# Altium PCB PCB.PcbDoc
Units mil, origin at the board's own origin, x right, y up, seen from the top; angles counter-clockwise.
Board outline 6000 x 4000 mil, 2 copper layers (Top Layer, Bottom Layer); 103 components, 49 nets, 312 pads, 12 vias.
Unrouted connection lines stored in the file: 214.
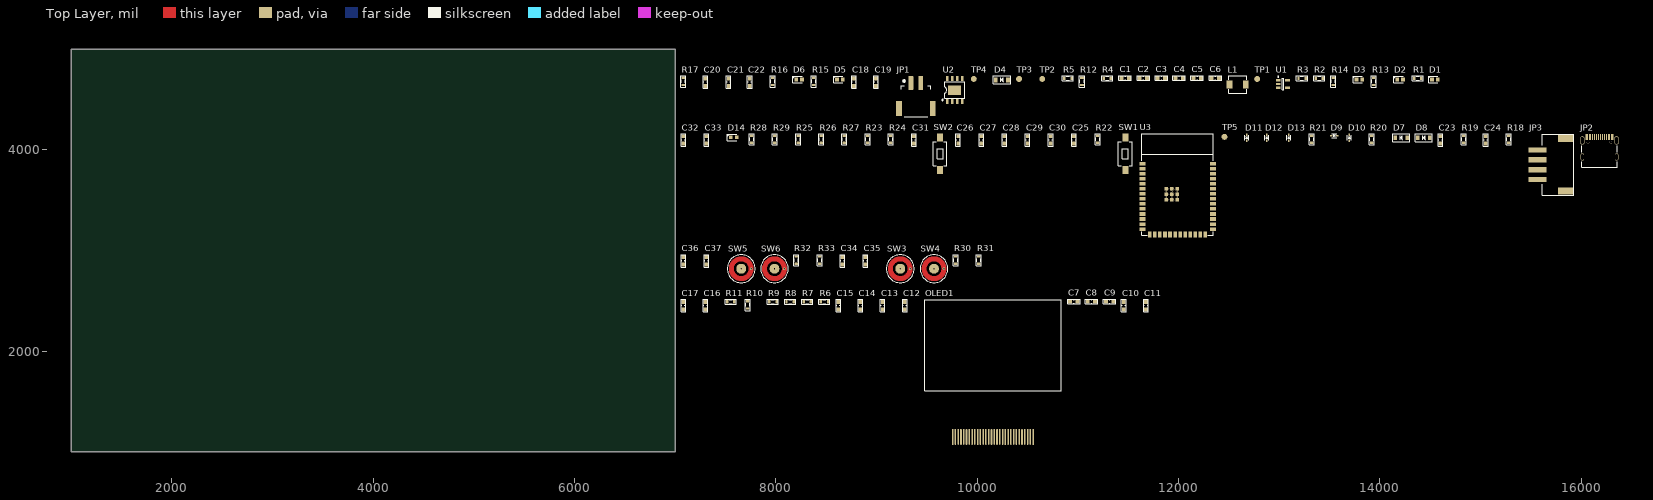
[diagram p0: Top Layer view]
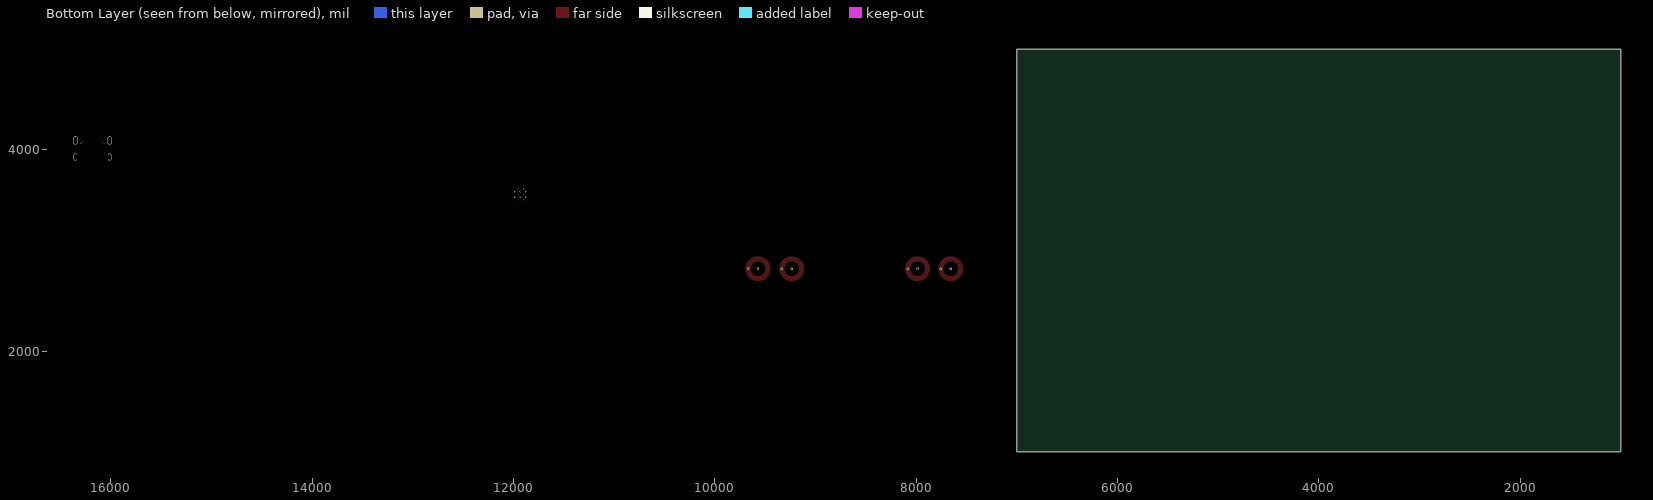
[diagram p1: Bottom Layer view, seen from below]

## Layer stack, top to bottom
Top Solder: solder mask 0.4, Solder Resist, Dk 3.5
Top Layer: signal copper 1.4
Dielectric 1: dielectric 12.6, FR-4, Dk 4.8
Bottom Layer: signal copper 1.4
Bottom Solder: solder mask 0.4, Solder Resist, Dk 3.5

## Board outline
1000,1000 7000,1000 7000,5000 1000,5000

## Design rules (kind name [scope] priority, off if disabled: settings)
Clearance [All] p1: gap=10 ignorepadtopadclearanceinfootprint=FALSE
PolygonConnect [All] p1: connectstyle=Relief reliefconductorwidth=10 reliefentries=4 polygonreliefangle="90 Angle" airgapwidth=10
RoutingVias [All] p1: holewidth=28 width=50 viastyle="Through Hole" minholewidth=28 minwidth=50 maxholewidth=28 maxwidth=50
SolderMaskExpansion [All] p1: expansion=4 istentingtop=FALSE
Width [All] p1: maxlimit=10 minlimit=10 preferedwidth=10
30 further rules are at their usual default settings.

## Classes and differential pairs
component class VOLTAGE_SOURCE: C1 C2 C3 C4 C5 C6 C18 C19 C20 C21 C22 D1 D2 D3 D4 D5 D6 JP1 L1 R1 R2 R3 R4 R5 R12 R13 R14 R15 R16 R17 TP1 TP2 TP3 TP4 U1 U2
component class MCU: C23 C24 C25 C26 C27 C28 C29 C30 C31 C32 C33 D7 D8 D9 D10 D11 D12 D13 D14 JP2 JP3 R18 R19 R20 R21 R22 R23 R24 R25 R26 R27 R28 R29 SW1 SW2 TP5 U3
component class FUNCTION_BUTTONS: C34 C35 C36 C37 R30 R31 R32 R33 SW3 SW4 SW5 SW6
component class DISPLAY: C7 C8 C9 C10 C11 C12 C13 C14 C15 C16 C17 OLED1 R6 R7 R8 R9 R10 R11

## Components (designator, comment, footprint, x,y, rotation, side; value= is the part's Value field where it differs from the comment)
C1 "10uF 16V" CAP_SMD_0603 11470,4715 r0 top
C2 "1uF 50V" CAP_SMD_0603 11650,4715 r0 top
C3 "100nF 50V" CAP_SMD_0603 11830,4715 r0 top
C4 "100nF 50V" CAP_SMD_0603 12005,4715 r0 top
C5 "1uF 50V" CAP_SMD_0603 12185,4715 r0 top
C6 "10uF 16V" CAP_SMD_0603 12365,4715 r0 top
C7 "10uF 16V" CAP_SMD_0603 10960,2495 r0 top
C8 "1uF 50V" CAP_SMD_0603 11135,2495 r0 top
C9 "100nF 50V" CAP_SMD_0603 11315,2495 r0 top
C10 "100nF 50V" CAP_SMD_0603 11455,2455 r90 top
C11 "100nF 50V" CAP_SMD_0603 11675,2455 r90 top
C12 "2.2uF 16V" CAP_SMD_0603 9280,2455 r90 top
C13 "2.2uF 16V" CAP_SMD_0603 9060,2455 r90 top
C14 "2.2uF 16V" CAP_SMD_0603 8840,2455 r90 top
C15 "2.2uF 16V" CAP_SMD_0603 8620,2455 r90 top
C16 "2.2uF 16V" CAP_SMD_0603 7300,2455 r90 top
C17 "10uF 16V" CAP_SMD_0603 7080,2455 r90 top
C18 "10uF 16V" CAP_SMD_0603 8775,4675 r90 top
C19 "1uF 50V" CAP_SMD_0603 8995,4675 r90 top
C20 "10uF 16V" CAP_SMD_0603 7300,4675 r90 top
C21 "1uF 50V" CAP_SMD_0603 7530,4675 r90 top
C22 "100nF 50V" CAP_SMD_0603 7740,4675 r90 top
C23 "10uF 16V" CAP_SMD_0603 14600,4100 r90 top
C24 "10uF 16V" CAP_SMD_0603 15050,4100 r90 top
C25 "100nF 50V" CAP_SMD_0603 10960,4100 r90 top
C26 "10uF 16V" CAP_SMD_0603 9810,4100 r90 top
C27 "100nF 50V" CAP_SMD_0603 10040,4100 r90 top
C28 "100nF 50V" CAP_SMD_0603 10270,4100 r90 top
C29 "100nF 50V" CAP_SMD_0603 10500,4100 r90 top
C30 "100nF 50V" CAP_SMD_0603 10730,4100 r90 top
C31 "100nF 50V" CAP_SMD_0603 9370,4100 r90 top
C32 "1uF 50V" CAP_SMD_0603 7080,4100 r90 top
C33 "1uF 50V" CAP_SMD_0603 7310,4100 r90 top
C34 "100nF 50V" CAP_SMD_0603 8660,2900 r90 top
C35 "100nF 50V" CAP_SMD_0603 8890,2900 r90 top
C36 "100nF 50V" CAP_SMD_0603 7080,2900 r90 top
C37 "100nF 50V" CAP_SMD_0603 7310,2900 r90 top
D1 "0603 RED" LED-0603 14545,4700 r0 top
D2 "0603 RED" LED-0603 14200,4700 r0 top
D3 "0603 RED" LED-0603 13795,4700 r0 top
D4 "1N5819" DIO-SMD-123 10245,4695 r0 top
D5 "0603 RED" LED-0603 8635,4700 r0 top
D6 "0603 GREEN" LED-0603 8230,4700 r0 top
D7 "1N5819" DIO-SMD-123 14210,4120 r0 top
D8 "1N5819" DIO-SMD-123 14435,4120 r0 top
D9 "TVS_5.6V" SOD_523 13515,4140 r0 top
D10 "TVS_5.6V" SOD_523 13695,4090 r90 top
D11 "TVS_5.6V" SOD_523 12675,4090 r90 top
D12 "TVS_5.6V" SOD_523 12875,4090 r90 top
D13 "TVS_5.6V" SOD_523 13095,4090 r90 top
D14 "0603 RED" LED-0603 7580,4125 r0 top
JP1 "X8821WRS-02L" CONN_X8821WRS-02L-LPSN 9390,4665 r0 top
JP2 "TYPE C 16P" "TYPE C 16P" 16180,3930 r0 top
JP3 "X8821WRS-04L" CONN_X8821WRS-04L-LPSN 15565,3705 r90 top
L1 "2.2uH 4.5A 20%" L0420 12665,4650 r0 top
OLED1 "OLED SSD1306 1.3\"" "OLED 1.3" 9755,1150 r0 top
R1 "330R 1%" RES_SMD_0603 14375,4710 r0 top
R2 "100K 1%" RES_SMD_0603 13395,4710 r0 top
R3 "0R" RES_SMD_0603 13225,4710 r0 top
R4 "680K 1%" RES_SMD_0603 11290,4710 r0 top
R5 "150K 1%" RES_SMD_0603 10900,4710 r0 top
R6 "0R" RES_SMD_0603 8480,2490 r0 top
R7 "10K 1%" RES_SMD_0603 8310,2490 r0 top
R8 "0R" RES_SMD_0603 8140,2490 r0 top
R9 "10K 1%" RES_SMD_0603 7970,2490 r0 top
R10 "0R" RES_SMD_0603 7720,2460 r90 top
R11 "390K 1%" RES_SMD_0603 7550,2490 r0 top
R12 "0R" RES_SMD_0603 11040,4680 r90 top
R13 "330R 1%" RES_SMD_0603 13940,4680 r90 top
R14 "330R 1%" RES_SMD_0603 13535,4680 r90 top
R15 "1K 1%" RES_SMD_0603 8375,4680 r90 top
R16 "1K 1%" RES_SMD_0603 7970,4680 r90 top
R17 "1.2K 1%" RES_SMD_0603 7080,4680 r90 top
R18 "0R" RES_SMD_0603 15280,4105 r90 top
R19 "0R" RES_SMD_0603 14830,4105 r90 top
R20 "0R" RES_SMD_0603 13920,4105 r90 top
R21 "0R" RES_SMD_0603 13320,4105 r90 top
R22 "0R" RES_SMD_0603 11195,4105 r90 top
R23 "4.7K 1%" RES_SMD_0603 8910,4105 r90 top
R24 "4.7K 1%" RES_SMD_0603 9140,4105 r90 top
R25 "330R 1%" RES_SMD_0603 8220,4105 r90 top
R26 "10K 1%" RES_SMD_0603 8450,4105 r90 top
R27 "10K 1%" RES_SMD_0603 8680,4105 r90 top
R28 "0R" RES_SMD_0603 7760,4105 r90 top
R29 "0R" RES_SMD_0603 7990,4105 r90 top
R30 "4.7K 1%" RES_SMD_0603 9785,2905 r90 top
R31 "4.7K 1%" RES_SMD_0603 10015,2905 r90 top
R32 "4.7K 1%" RES_SMD_0603 8200,2905 r90 top
R33 "4.7K 1%" RES_SMD_0603 8435,2905 r90 top
SW1 "TACTILE_2P" "C&K SW 2P" 11470,3800 r90 top
SW2 "TACTILE_2P" "C&K SW 2P" 9630,3800 r90 top
SW3 "TOUCH_BUTTON" TOUCH_BUTTON 9235,2820 r0 top
SW4 "TOUCH_BUTTON" TOUCH_BUTTON 9570,2820 r0 top
SW5 "TOUCH_BUTTON" TOUCH_BUTTON 7655,2820 r0 top
SW6 "TOUCH_BUTTON" TOUCH_BUTTON 7985,2820 r0 top
TP1 "Test Point" TEST_POINT 12780,4705 r0 top
TP2 "Test Point" TEST_POINT 10645,4705 r90 top
TP3 "Test Point" TEST_POINT 10415,4705 r90 top
TP4 "Test Point" TEST_POINT 9965,4705 r90 top
TP5 "Test Point" TEST_POINT 12455,4130 r90 top
U1 "SY8088AAC" SOT23_5 13035,4655 r0 top
U2 "TP4056" ESOP-8 9775,4595 r0 top
U3 "ESP32-S3-WROOM-1-N4" ESP32-S3-WROOM-1 11875,3615 r0 top

## Footprints (in the part's own frame and the unit in brackets; to place one, negate y for a bottom-side part, rotate by r counter-clockwise, add the part's x,y. Pads: shape width x height; smd on the part's side, far side on the other; paste and mask are expansions set on the pad)
"C&K SW 2P" [mm]
  rect 2x1.5 smd paste+0 mask+0.051: 1(0,0) 2(8.2,0)
  silkscreen extent 1.1,-1.75 7.1,1.75, body extent 0.06,-1.8 8.06,1.8, height 2.5
CAP_SMD_0603 [mm]
  rect 1x0.95 smd mask+0.076: 1(-0.965,0) 2(0.914,0)
  silkscreen extent -1.6,-0.58 1.55,0.58, body extent -0.8,-0.39 0.8,0.41, height 0.9
CONN_X8821WRS-02L-LPSN [mm]
  rrect20% 1.2x3.5 smd: 1(-1.25,0) 2(1.25,0)
  rrect20% 1.5x3.8 smd: 6(-4.25,-6.45) 7(4.25,-6.45)
  silkscreen extent -3.75,-8.5 3.75,0.6, body extent -4.97,-8.5 4.98,1.5, height 6.1
CONN_X8821WRS-04L-LPSN [mm]
  rect 1.3x4.5 smd paste+0 mask+0.051: 1(0,0) 2(2.5,0) 3(5,0) 4(7.5,0)
  rect 1.8x3.9 smd paste+0 mask+0.051: 5(10.34,-7.12) 6(-2.84,-7.12)
  silkscreen extent -3.95,-9.19 11.45,-1.19, body extent -3.82,-8.51 11.18,1.69, height 6.1
DIO-SMD-123 [mm]
  rect 0.9x1.2 smd: A(1.524,0) C(-1.524,0)
  silkscreen extent -2.16,-1.02 2.16,1.02, body extent -1.76,-0.8 1.94,0.8, height 1.25
ESOP-8 [mm]
  rect 0.6x1.2 smd paste+0 mask+0.051: 1(-1.905,-2.908) 2(-0.635,-2.908) 3(0.635,-2.908) 4(1.905,-2.908) 5(1.905,2.908) 6(0.635,2.908) 7(-0.635,2.908) 8(-1.905,2.908)
  rect 3.3x2.4 smd paste+0 mask+0.051: 9(0,0)
  silkscreen extent -3.2,-2.67 2.55,2.05, body extent -2.45,-3 2.45,3, height 1.75
ESP32-S3-WROOM-1 [mm]
  rect 1.5x0.9 smd paste+0 mask+0.05: 1(-6,6.319) 2(-6,5.049) 3(-6,3.779) 4(-6,2.509) 5(-6,1.239) 6(-6,-0.031) 7(-6,-1.301) 8(-6,-2.571) 9(-6,-3.841) 10(-6,-5.111) 11(-6,-6.381) 12(-6,-7.651) 13(-6,-8.921) 14(-6,-10.191) 27(11.8,-10.191) 28(11.8,-8.921) 29(11.8,-7.651) 30(11.8,-6.381) 31(11.8,-5.111) 32(11.8,-3.841) 33(11.8,-2.571) 34(11.8,-1.301) 35(11.8,-0.031) 36(11.8,1.239) 37(11.8,2.509) 38(11.8,3.779) 39(11.8,5.049) 40(11.8,6.319)
  rect 0.9x1.5 smd paste+0 mask+0.05: 15(-4.085,-11.59) 16(-2.815,-11.59) 17(-1.545,-11.59) 18(-0.275,-11.59) 19(0.995,-11.59) 20(2.265,-11.59) 21(3.535,-11.59) 22(4.805,-11.59) 23(6.075,-11.59) 24(7.345,-11.59) 25(8.615,-11.59) 26(9.885,-11.59)
  rect 0.9x0.9 smd paste+0 mask+0.051: 41(0,-2.8) 41(0,-1.4) 41(0,0) 41(1.4,-2.8) 41(1.4,-1.4) 41(1.4,0) 41(2.8,-2.8) 41(2.8,-1.4) 41(2.8,0)
  silkscreen extent -6.1,-11.69 11.9,13.81, body extent -6.1,-11.74 11.94,13.78, height 3.1
L0420 [mm]
  rect 1.4x2.12 smd paste+0 mask+0.051: 1(0,0) 2(-4.056,0)
  silkscreen extent -4.3,-2.18 0.25,2.18, body extent -4.18,-2 0.12,2, height 2.2
LED-0603 [mm]
  rect 0.95x0.95 smd: 1(-0.75,0) 2(0.75,0)
  silkscreen extent -1.58,-0.82 0.75,0.82, body extent -0.8,-0.4 0.8,0.4, height 0.8
"OLED 1.3" [mm]
  rect 0.4x4 smd: A1(0,0) A10(6.3,0) A20(13.3,0) A30(20.3,0)
  oval 0.4x4 smd: A2(0.7,0) A3(1.4,0) A4(2.1,0) A5(2.8,0) A6(3.5,0) A7(4.2,0) A8(4.9,0) A9(5.6,0) A11(7,0) A12(7.7,0) A13(8.4,0) A14(9.1,0) A15(9.8,0) A16(10.5,0) A17(11.2,0) A18(11.9,0) A19(12.6,0) A21(14,0) A22(14.7,0) A23(15.4,0) A24(16.1,0) A25(16.8,0) A26(17.5,0) A27(18.2,0) A28(18.9,0) A29(19.6,0)
  silkscreen extent -7.04,11.61 27.46,34.65, body extent -7.09,-0.41 27.41,34.59, height 1.45
RES_SMD_0603 [mm]
  rect 0.6x0.9 smd: 1(-0.889,0) 2(0.927,0)
  silkscreen extent -1.4,-0.64 1.4,0.64, body extent -0.8,-0.4 0.8,0.4, height 0.43
SOD_523 [mm]
  rect 0.6x0.4 smd paste+0 mask+0.051: 1(0,0) 2(1.5,0)
  silkscreen extent 0.1,-0.5 1.4,0.5, body extent -0.04,-0.4 1.56,0.4, height 0.7
SOT23_5 [mm]
  rect 1.15x0.6 smd: 1(-1.175,0.95) 2(-1.175,0) 3(-1.175,-0.95) 4(1.175,-0.95) 5(1.175,0.95)
  silkscreen extent -1.3,-1.5 0.2,1.92, body extent -1.4,-1.45 1.4,1.45, height 1.45
TEST_POINT [mm]
  round 1.5 smd: 1(0,0)
TOUCH_BUTTON [mm]
  round 2.5 smd: 1(0,0)
  round 0.61 hole 0.31: 1(0,0) 2(2.5,0)
  Top Layer circle w1.25: c0,0 r2.5
  silkscreen extent -3.5,-3.5 3.5,3.5
"TYPE C 16P" [mm]
  rect 0.6x1.5 smd: A1_B12(-3.2,5.004) A4_B9(-2.4,5.004) B1_A12(3.2,5.004) B4_A9(2.4,5.004)
  rect 0.3x1.5 smd: A5(-1.25,5.004) A6(-0.25,5.004) A7(0.25,5.004) A8(1.25,5.004) B5(1.75,5.004) B6(0.75,5.004) B7(-0.75,5.004) B8(-1.75,5.004)
  oval 1.05x2.1 hole 0.6 slot 1.7 at 90 deg: SH1(-4.32,4.18) SH2(4.32,4.18)
  oval 0.9x1.8 hole 0.6 slot 1.4 at 90 deg: SH3(-4.32,0) SH4(4.32,0)
  round 0.65 hole 0.65 unplated: ""(-2.89,3.68) ""(2.89,3.68)
  silkscreen extent -4.47,-2.6 4.47,2.81, body extent -4.5,-2.55 4.44,5.35, height 3.16

## Part data
C1 C6 C7 C17 C18 C20 C23 C24 C26: library part C0603_MLCC_10uF_16V, "10 µF ±20% 16V Ceramic Capacitor X6S 0603 (1608 Metric)", Manufacture Part Number=GRM188C81C106MA73D, Manufacturer="Murata Electronics", Link=https://www.digikey.cn/en/products/detail/murata-electronics/GRM188C81C106MA73D/3900463, Packaging="Cut Tape (CT)", Price=$0.25, Size=0603
C2 C5 C8 C19 C21 C32 C33: library part C0603_MLCC_1uF_50V, "1 µF ±10% 50V Ceramic Capacitor X5R 0603 (1608 Metric)", Manufacture Part Number=CL10A105KB8NNNC, Manufacturer="Samsung Electro-Mechanics", Link=https://www.digikey.cn/en/products/detail/samsung-electro-mechanics/CL10A105KB8NNNC/3887518, Packaging="Cut Tape (CT)", Price=$0.14, Size=0603
C3 C4 C9 C10 C11 C22 C25 C27 C28 C29 C30 C31 C34 C35 C36 C37: library part C0603_MLCC_100nF_50V, "0.1 µF ±10% 50V Ceramic Capacitor X7R 0603 (1608 Metric)", Manufacture Part Number=CL10B104KB8NNNC, Manufacturer="Samsung Electro-Mechanics", Link=https://www.digikey.cn/en/products/detail/samsung-electro-mechanics/CL10B104KB8NNNC/3886658, Packaging="Cut Tape (CT)", Price=$0.10, Size=0603
C12 C13 C14 C15 C16: library part C0603_MLCC_2.2uF_16V, "2.2 µF ±10% 16V Ceramic Capacitor X5R 0603 (1608 Metric)", Manufacture Part Number=CL10A225KO8NNNC, Manufacturer="Samsung Electro-Mechanics", Link=https://www.digikey.cn/en/products/detail/samsung-electro-mechanics/CL10A225KO8NNNC/3886698, Packaging="Cut Tape (CT)", Price=$0.10, Size=0603
D1 D2 D3 D5 D14: library part LED_0603_RED, "Red 625nm LED Indication - Discrete 2V 0603 (1608 Metric)", Manufacture Part Number=150060RS75000, Manufacturer="Würth Elektronik", Link=https://www.digikey.cn/en/products/detail/w%C3%BCrth-elektronik/150060RS75000/4489901, Packaging="Cut Tape (CT)", Price=$0.15
D4 D7 D8: "Diode 40 V 1A Surface Mount SOD-123", Capacitance @ Vr, F="60pF @ 4V, 1MHz", Current - Average Rectified (Io)=1A, Manufacture Part Number=1N5819HW-7-F, Manufacturer="Diodes Incorporated", Operating Temperature - Junction="-65°C ~ 125°C", Voltage - DC Reverse (Vr) (Max)="40 V", Voltage - Forward (Vf) (Max) @ If="450 mV @ 1 A", Link=https://www.digikey.cn/en/products/detail/diodes-incorporated/1N5819HW-7-F/814970, Packaging="Cut Tape (CT)", Price=$0.43
D6: library part LED_0603_GREEN, "Green 520nm LED Indication - Discrete 3.2V 0603 (1608 Metric)", Manufacture Part Number=150060GS75000, Manufacturer="Würth Elektronik", Link=https://www.digikey.cn/en/products/detail/w%C3%BCrth-elektronik/150060GS75000/4489898, Packaging="Cut Tape (CT)", Price=$0.15
D9 D10 D11 D12 D13: "9.4A 18.6V 5.6V Bi-Directional 5V SOD-523 Electrostatic and Surge Protection (TVS/ESD) ROHS", Manufacture Part Number=LESD5D5.0CT1G, Manufacturer=LRC, Voltage - Breakdown (Min)=6V, Voltage - Clamping (Max) @ Ipp=8V, Voltage - Reverse Standoff (Typ)=4V, Link=https://www.lcsc.com/product-detail/New-Arrivals_Leshan-Radio-LESD5D5-0CT1G_C383211.html, Packaging="Cut Tape (CT)", Price="$ 0.0149"
JP1: "1x2P 2P 1 Tin 2.5mm 2 Brass 2A Surface Mount，Right Angle SMD,P=2.5mm,Surface Mount，Right Angle Wire To Board Connector ROHS", Manufacture Part Number=X8821WRS-02L-LPSN, Manufacturer="XKB Connection", Link=https://www.lcsc.com/product-detail/Wire-To-Board-Connector_XKB-Connection-X8821WRS-02L-LPSN_C519150.html, Price="$ 0.0852"
JP2: library part TYPE_C_16P, "USB-C (USB TYPE-C) USB 2.0 Receptacle Connector 24 (16+8 Dummy) Position Surface Mount, Right Angle; Through Hole", Manufacture Part Number=12402012E212A, Manufacturer="Amphenol ICC (Commercial Products)", Link=https://www.digikey.cn/en/products/detail/amphenol-cs-commercial-products/12402012E212A/13683192, Packaging="Cut Tape", Price=$0.79
JP3: "1x4P 4P XH 1 Tin 2.5mm 4 3A Brass Surface Mount，Right Angle SMD,P=2.5mm,Surface Mount，Right Angle Wire To Board Connector ROHS", Manufacture Part Number=X8821WRS-04-9TSN, Manufacturer="XKB Connection", Link=https://www.lcsc.com/product-detail/Wire-To-Board-Connector_XKB-Connection-X8821WRS-04-9TSN_C397434.html, Price="$ 0.1564"
L1: library part L_0420_2.2uH_4.5A, "4.5A 2.2uH Molding Choke ±20% 5A SMD,0420 Power Inductors ROHS", Current=4.5A, Inductor=2.2uH, Manufacture Part Number=XR0420-2R2M, Manufacturer=XR, Tolerance=20%, Link=https://www.lcsc.com/product-detail/Power-Inductors_XR-XR0420-2R2M_C5307589.html, Price="$ 0.0661"
OLED1: library part "1.3\"_SSD1306_OLED", "SSD1306 1.3 - Organic Light Emitting Diode Display Screen ROHS", Manufacture Part Number=UG-2864KSWLG01, Manufacturer="UG(Univision Semicon)", ComponentLink1Description="New link", Link=https://www.lcsc.com/product-detail/Organic-Light-Emitting-Diode-Display-Screen_UG-Univision-Semicon-UG-2864KSWLG01_C113322.html, Link 2=https://shopee.vn/M%C3%A0n-h%C3%ACnh-LCD-SUBEI-ssd1306-12864-B%E1%BA%A3ng-m%C3%A0n-h%C3%ACnh-LCD-LCD-m%C3%B4-%C4%91un-m%C3%A0n-h%C3%ACnh-LCD-OLED-1-3-inch-12864-OLED-30PIN-c%C3%B3-th%E1%BB%83-s%E1%BB%AD-d%E1%BB%A5ng-i.293689495.25025709755?sp_atk=b5fb3fe1-8310-4ca9-bbd1-9b1802fa8d8a&xptdk=b5fb3fe1-8310-4ca9-bbd1-9b1802fa8d8a, Price=$1.96
R1 R13 R14 R25: library part R0603_330R, "330 Ohms ±1% 0.1W, 1/10W Chip Resistor 0603 (1608 Metric) Thick Film", Manufacture Part Number=CRG0603F330R, Manufacturer="TE Connectivity Passive Product", Link=https://www.digikey.cn/en/products/detail/te-connectivity-passive-product/CRG0603F330R/2380765, Packaging="Cut Tape (CT)", Price=$0.10, Size=0603
R2: library part R0603_100K, "100 kOhms ±1% 0.1W, 1/10W Chip Resistor 0603 (1608 Metric) Moisture Resistant Thick Film", Manufacture Part Number=RC0603FR-07100KL, Manufacturer=YAGEO, Link=https://www.digikey.cn/en/products/detail/yageo/RC0603FR-07100KL/726889, Packaging="Cut Tape (CT)", Price=$0.10, Size=0603
R3 R6 R8 R10 R12 R18 R19 R20 R21 R22 R28 R29: library part R0603_0R, "0 Ohms Jumper Chip Resistor 0603 (1608 Metric) Automotive AEC-Q200 Thick Film", Manufacture Part Number=RMCF0603ZT0R00, Manufacturer="Stackpole Electronics Inc", Link=https://www.digikey.cn/en/products/detail/stackpole-electronics-inc/RMCF0603ZT0R00/1756908, Packaging="Cut Tape (CT)", Price=$0.10, Size=0603
R4: library part R0603_680K, "680 kOhms ±1% 0.1W, 1/10W Chip Resistor 0603 (1608 Metric) Moisture Resistant Thick Film", Manufacture Part Number=RC0603FR-07680KL, Manufacturer=YAGEO, Link=https://www.digikey.cn/en/products/detail/yageo/RC0603FR-07680KL/727356, Packaging="Cut Tape (CT)", Price=$0.10, Size=0603
R5: library part R0603_150K, "150 kOhms ±1% 0.1W, 1/10W Chip Resistor 0603 (1608 Metric) Automotive AEC-Q200 Thick Film", Manufacture Part Number=CRCW0603150KFKEA, Manufacturer="Vishay Dale", Link=https://www.digikey.cn/en/products/detail/vishay-dale/CRCW0603150KFKEA/1174914, Packaging="Cut Tape (CT)", Price=$0.10, Size=0603
R7 R9 R26 R27: library part R0603_10K, "10 kOhms ±1% 0.1W, 1/10W Chip Resistor 0603 (1608 Metric) Moisture Resistant Thick Film", Manufacture Part Number=RC0603FR-0710KL, Manufacturer=YAGEO, Link=https://www.digikey.cn/en/products/detail/yageo/RC0603FR-0710KL/726880, Packaging="Cut Tape (CT)", Price=$0.10, Size=0603
R11: library part R0603_390K, "390 kOhms ±1% 0.1W, 1/10W Chip Resistor 0603 (1608 Metric) Moisture Resistant Thick Film", Manufacture Part Number=RC0603FR-07390KL, Manufacturer=YAGEO, Link=https://www.digikey.cn/en/products/detail/yageo/RC0603FR-07390KL/727199, Packaging="Cut Tape (CT)", Price=$0.10, Size=0603
R15 R16: library part R0603_1K, "1 kOhms ±1% 0.1W, 1/10W Chip Resistor 0603 (1608 Metric) Moisture Resistant Thick Film", Manufacture Part Number=RC0603FR-071KL, Manufacturer=YAGEO, Link=https://www.digikey.cn/en/products/detail/yageo/RC0603FR-071KL/726843, Packaging="Cut Tape (CT)", Price=$0.10, Size=0603
R17: library part R0603_1.2K, "1.2 kOhms ±1% 0.1W, 1/10W Chip Resistor 0603 (1608 Metric) Automotive AEC-Q200 Thick Film", Manufacture Part Number=RC0603FR-071KL, Manufacturer="Stackpole Electronics Inc", Link=https://www.digikey.cn/en/products/detail/stackpole-electronics-inc/RMCF0603FT1K20/1761134, Packaging="Cut Tape (CT)", Price=$0.10, Size=0603
R23 R24 R30 R31 R32 R33: library part R0603_4.7K, "4.7 kOhms ±1% 0.1W, 1/10W Chip Resistor 0603 (1608 Metric) Moisture Resistant Thick Film", Manufacture Part Number=RC0603FR-074K7L, Manufacturer=YAGEO, Link=https://www.digikey.com/en/products/detail/yageo/RC0603FR-074K7L/727212, Packaging="Cut Tape (CT)", Price=$0.10, Size=0603
SW1 SW2: library part SWITCH_TACTILE_SPST, "Tactile Switch SPST-NO Top Actuated Surface Mount", Manufacture Part Number="PTS636 SM25F SMTR LFS", Manufacturer=C&K, Link=https://www.digikey.cn/en/products/detail/c-k/PTS636-SM25F-SMTR-LFS/10071742?s=N4IgTCBcDaIAoBUDKA2AzCgBEgsmArAGLY4IBKmAMoUiALoC%2BQA, Packaging="Cut Tape (CT)", Price=$0.24
TP1 TP2 TP3 TP4 TP5: library part TEST_POINT
U1: "Step-down type SOT-23-5 DC-DC Converters ROHS", Manufacturer="Silergy Corp", Link=https://www.lcsc.com/product-detail/DC-DC-Converters_Silergy-Corp-SY8088AAC_C79313.html, Manufacture Part Number=SY8088AAC, Price="$ 0.0865"
U2: "ESOP-8 Battery Management ICs ROHS", Manufacturer="UMW(Youtai Semiconductor Co., Ltd.)", Link=https://www.lcsc.com/product-detail/Battery-Management-ICs_UMW-Youtai-Semiconductor-Co-Ltd-TP4056_C725790.html, Manufacture Part Number=TP4056, Packaging="Cut Tape (CT)", Price="$ 0.0565"
U3: "SMD,18x25.5mm WiFi Modules ROHS", Manufacturer="Espressif Systems", Link=https://www.lcsc.com/product-detail/WiFi-Modules_Espressif-Systems-ESP32-S3-WROOM-1-N4_C2913197.html, Manufacture Part Number=ESP32-S3-WROOM-1-N4, Packaging="Cut Tape (CT)", Price="$ 3.71"

## Via types
v1: diameter 15.75, hole 9.84, Top Layer to Bottom Layer, 12 vias

## Nets (pads, with @x,y where several pads share a name; then routed paths per layer and width w, separated by ;. In a path a pad name is that pad's centre, name@x,y a point inside that pad or via, vN(x,y) a via of type N, cw(c..) or ccw(c..) an arc to the next point about the centre after c; other vN are vias at no path point)
3.3V: C7.2 C8.2 C9.2 C10.2 C11.2 C14.2 C15.2 C26.1 C27.2 C28.2 C29.2 C30.2 OLED1.A6 OLED1.A9 R1.1 R3.2 R6.1 R8.1 R22.2
CHIP_PU: C25.2 C32.2 R26.1 SW1.2 U3.3
DWN_BTN: C36.2 R32.1 SW5.2 U3.5
ESP_3.3V: R22.1 R23.2 R24.2 R25.1 R26.2 R27.2 R30.2 R31.2 R32.2 R33.2 TP5.1 U3.2
GND: C1.1 C2.1 C3.1 C4.1 C5.1 C6.1 C7.1 C8.1 C9.1 C10.1 C11.1 C14.1 C15.1 C16.2 C17.1 C18.1 C19.1 C20.1 C21.1 C22.1 C23.2 C24.2 C25.1 C26.2 C27.1 C28.1 C29.1 C30.1 C31.1 C32.1 C33.1 C34.1 C35.1 C36.1 C37.1 D1.2 D2.2 D3.2 D7.A D8.A D9.1 D10.1 D11.1 D12.1 D13.1 D14.2 JP1.2 JP2.A1_B12 JP2.B1_A12 JP3.4 OLED1.A1 OLED1.A8 OLED1.A10 OLED1.A12 OLED1.A29 OLED1.A30 R5.1 R7.1 R9.1 R11.1 R12.1 R17.1 SW1.1 SW2.1 SW3.1 SW4.1 SW5.1 SW6.1 TP2.1 U1.2 U2.1 U2.3 U2.9 U3.1 U3.40 U3.41
IO0: C31.2 C33.2 R27.1 SW2.2 U3.27
L_BTN: C37.2 R33.1 SW6.2 U3.7
NetC4_2: C4.2 C5.2 C6.2 L1.2 R2.2 R3.1 R4.2 TP1.1
NetC12_1: C12.1 OLED1.A2
NetC12_2: C12.2 OLED1.A3
NetC13_1: C13.1 OLED1.A5
NetC13_2: C13.2 OLED1.A4
NetC16_1: C16.1 OLED1.A27
NetC17_2: C17.2 OLED1.A28
NetC18_2: C18.2 C19.2 D4.A JP1.1 U2.5
NetD1_1: D1.1 R1.2
NetD2_1: D2.1 R13.2
NetD3_1: D3.1 R14.2
NetD5_1: D5.1 R15.1
NetD5_2: D5.2 U2.7
NetD6_1: D6.1 R16.1
NetD6_2: D6.2 U2.6
NetD9_2: D9.2 JP3.2 R18.1
NetD10_2: D10.2 JP3.3 R19.1
NetD12_2: D12.2 JP2.A6 JP2.B6 R20.1
NetD13_2: D13.2 JP2.A7 JP2.B7 R21.1
NetD14_1: D14.1 R25.2
NetL1_1: L1.1 U1.3
NetOLED1_A11: OLED1.A11 R6.2 R7.2
NetOLED1_A15: OLED1.A15 R8.2 R9.2
NetOLED1_A20: OLED1.A20 R10.2
NetOLED1_A26: OLED1.A26 R11.2
NetR2_1: R2.1 R12.2 U1.1
NetR4_1: R4.1 R5.2 U1.5
NetR17_2: R17.2 U2.2
NetR23_1: R23.1 R28.1
NetR24_1: R24.1 R29.1
OLED_CS: OLED1.A13 U3.15
OLED_RST: OLED1.A14 U3.16
OLED_SCLK_SCK: OLED1.A18 R28.2 U3.17
OLED_SDIN_SDA: OLED1.A19 R10.1 R29.2 U3.18
R_BTN: C35.2 R31.1 SW4.2 U3.6
RXD0: R19.2 U3.36
TXD0: R18.2 U3.37
UP_BTN: C34.2 R30.1 SW3.2 U3.4
USB_DN: R21.2 U3.13
USB_DP: R20.2 U3.14
VBAT: C1.2 C2.2 C3.2 C23.1 D4.C D7.C JP3.1 R13.1 TP3.1 U1.4
VBUS: C20.2 C21.2 C22.2 C24.1 D8.C D11.2 JP2.A4_B9 JP2.B4_A9 R14.1 R15.2 R16.2 TP4.1 U2.4 U2.8
pads on no net: JP1.6 JP1.7 JP2. JP2.A5 JP2.A8 JP2.B5 JP2.B8 JP2.SH1 JP2.SH2 JP2.SH3 JP2.SH4 JP3.5 JP3.6 OLED1.A7 OLED1.A16 OLED1.A17 OLED1.A21 OLED1.A22 OLED1.A23 OLED1.A24 OLED1.A25 U3.8 U3.9 U3.10 U3.11 U3.12 U3.19 U3.20 U3.21 U3.22 U3.23 U3.24 U3.25 U3.26 U3.28 U3.29 U3.30 U3.31 U3.32 U3.33 U3.34 U3.35 U3.38 U3.39
copper on no net:
  other v1: 11902.56,3504.76 11957.68,3504.76 11875,3532.32 11930.12,3532.32 11985.24,3532.32 11902.56,3559.88 11957.68,3559.88 11875,3587.44 11930.12,3587.44 11985.24,3587.44 11902.56,3615 11957.68,3615